# EAGLE board es (EAGLE 6.1)
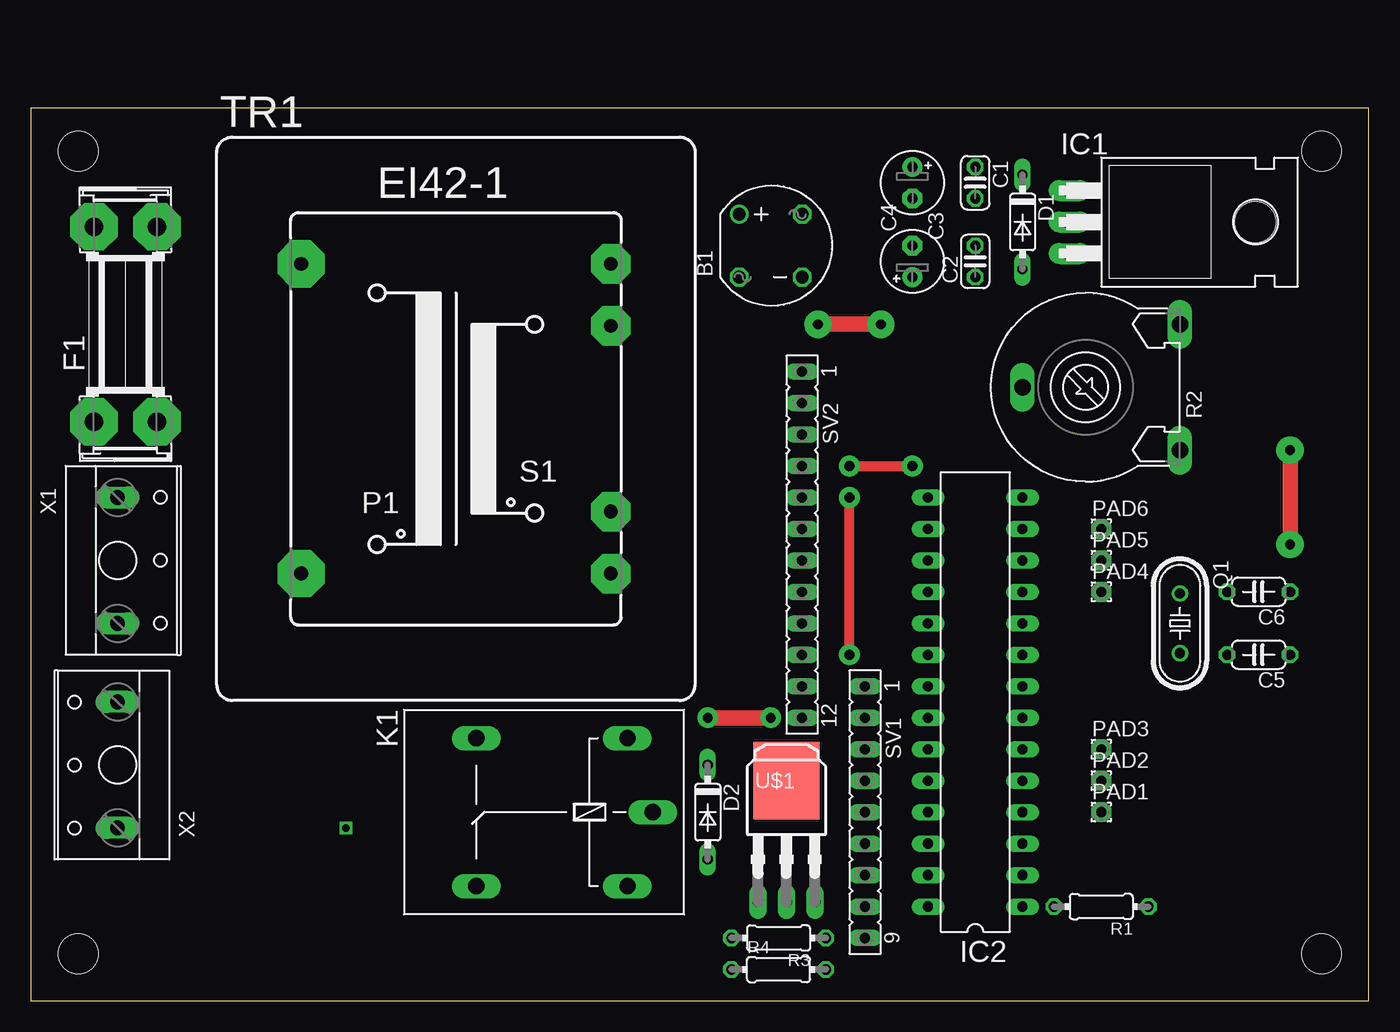
[diagram p0: board, top side]
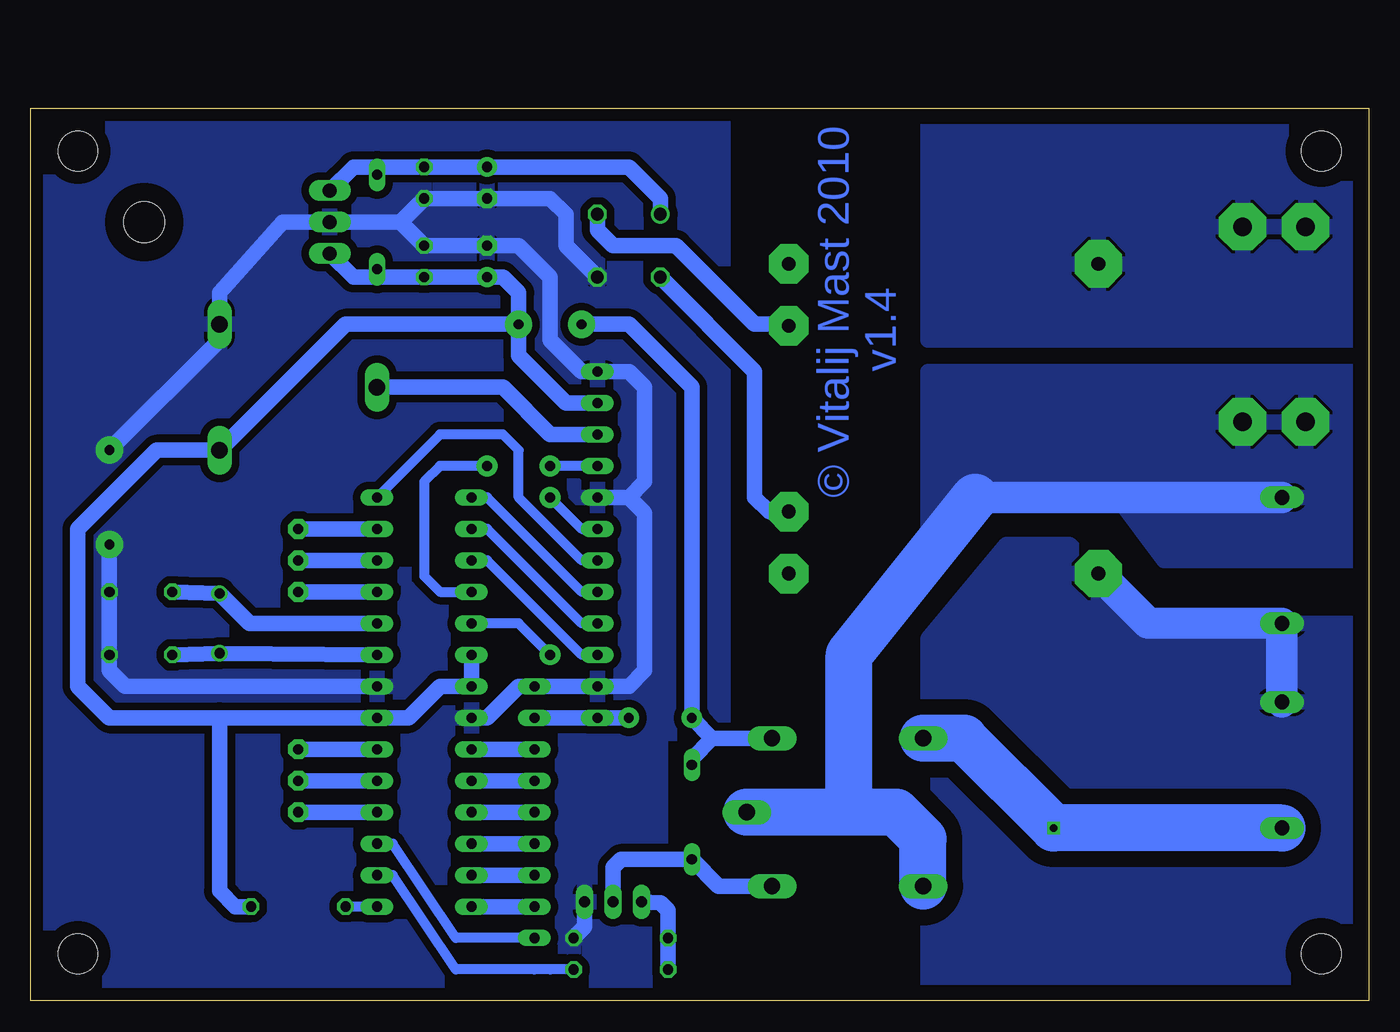
[diagram p1: board, bottom side, seen from below]

Size 107.93 x 72.06 mm. Coordinates in mm from the lower left corner, seen from the top.
Outline: 0,0 107.93,0 107.93,72.06 0,72.06 0,0
Copper layers (1*16): Top 0.035mm / dielectric 1.5mm / Bottom 0.035mm
Design rules: minimum track width 10mil, minimum drill 24mil, track to track 8mil, track to pad 8mil, pad to pad 8mil, via to via 8mil, smd to smd 8mil, copper to edge 40mil, drill to drill 8mil, minimum pad ring 10mil, minimum via ring 8mil, stop-mask expansion 4mil, vias tented up to drill 0mil, thermal gap 10mil
Holes 3.2 mm at 3.81,3.81 3.81,68.58 104.14,68.58 104.14,3.81

## Footprints (pad centres in the part's own frame; a part is rotated, then mirrored left to right if it is on the bottom)
RB1A = drill 1.016: + -2.54,2.54 | drill 1.016 octagon: - 2.54,-2.54; AC1 2.54,2.54; AC2 -2.54,-2.54
C025-024X044 = drill 0.813 octagon: 1 -1.27,0; 2 1.27,0
E2,5-5 = drill 0.813 pad 1.6: + -1.27,0 | drill 0.813 pad 1.6 octagon: - 1.27,0
C050-024X044 = drill 0.813 octagon: 1 -2.54,0; 2 2.54,0
DO35-7 = drill 0.813 long: A 3.81,0; C -3.81,0
SHK20Q = drill 1.5 pad 3.81 octagon: 1A -7.874,2.54; 1B -7.874,-2.54; 2A 7.874,2.54; 2B 7.874,-2.54
TO220H = drill 1.118 long: 1 -2.54,-10.16; 2 0,-10.16; 3 2.54,-10.16 | hole 3.302: 0,4.826
DIL28-3 = drill 0.813 long: 1 -16.51,-3.81; 2 -13.97,-3.81; 3 -11.43,-3.81; 4 -8.89,-3.81; 5 -6.35,-3.81; 6 -3.81,-3.81; 7 -1.27,-3.81; 8 1.27,-3.81; 9 3.81,-3.81; 10 6.35,-3.81; 11 8.89,-3.81; 12 11.43,-3.81; 13 13.97,-3.81; 14 16.51,-3.81; 15 16.51,3.81; 16 13.97,3.81; 17 11.43,3.81; 18 8.89,3.81; 19 6.35,3.81; 20 3.81,3.81; 21 1.27,3.81; 22 -1.27,3.81; 23 -3.81,3.81; 24 -6.35,3.81; 25 -8.89,3.81; 26 -11.43,3.81; 27 -13.97,3.81; 28 -16.51,3.81
G5LE = drill 1.321 long: 1 -7.493,-5.969; 2 -7.493,5.969; O 4.699,5.969; P -9.525,0; S 4.699,-5.969
1,6/0,8 = drill 0.813 pad 1.6 octagon: 1 0,0
HC49/S = drill 0.813: 1 -2.413,0; 2 2.413,0
0204/7 = drill 0.813 octagon: 1 -3.81,0; 2 3.81,0
LI15 = drill 1.321 long: A -5.08,-7.62; E 5.08,-7.62; S 0,5.08
FE09 = drill 0.813 long: 1 -10.16,0; 2 -7.62,0; 3 -5.08,0; 4 -2.54,0; 5 0,0; 6 2.54,0; 7 5.08,0; 8 7.62,0; 9 10.16,0
FE12 = drill 0.813 long: 1 -13.97,0; 2 -11.43,0; 3 -8.89,0; 4 -6.35,0; 5 -3.81,0; 6 -1.27,0; 7 1.27,0; 8 3.81,0; 9 6.35,0; 10 8.89,0; 11 11.43,0; 12 13.97,0
EI42-1 = drill 1.118 pad 3.81 octagon: 1 -12.497,12.497; 5 -12.497,-12.497 | drill 1.118 pad 3.175 octagon: 6 12.497,-12.497; 7 12.497,-7.493; 9 12.497,7.493; 10 12.497,12.497
I-PAK_TO251AA = drill 0.889 long: 1 -2.286,-5.334; 2 0,-5.334; 3 2.286,-5.334 | smd 5.334 x 6.223: 4 0,4.445
W237-2N = drill 1.194 long: 1 -5.08,-0.635; 2 5.08,-0.635

## Placement (x,y rotation side)
B1  B380  [RB1A]  59.69,60.96 0 top
C1  0.1µF  [C025-024X044]  76.2,66.04 270 top
C2  0.1µF  [C025-024X044]  76.2,59.69 90 top
C3  47µF  [E2,5-5]  71.12,66.04 270 top
C4  47µF  [E2,5-5]  71.12,59.69 90 top
C5  22pF  [C050-024X044]  99.06,27.94 180 top
C6  22pF  [C050-024X044]  99.06,33.02 180 top
D1  1N4148  [DO35-7]  80.01,62.87 270 top
D2  1N4148  [DO35-7]  54.61,15.24 270 top
F1  350mA  [SHK20Q]  7.62,54.61 90 top
IC1  7805T  [TO220H]  93.98,62.87 270 top
IC2  ATMEGA48/88/168-PU  [DIL28-3]  76.2,24.13 90 top
K1  FINDER 36.11.9  [G5LE]  40.64,15.24 180 top
PAD1  [1,6/0,8]  86.36,15.24 0 top
PAD2  [1,6/0,8]  86.36,17.78 0 top
PAD3  [1,6/0,8]  86.36,20.32 0 top
PAD4  [1,6/0,8]  86.36,33.02 0 top
PAD5  [1,6/0,8]  86.36,35.56 0 top
PAD6  [1,6/0,8]  86.36,38.1 0 top
Q1  20MHz  [HC49/S]  92.71,30.48 270 top
R1  10k  [0204/7]  86.36,7.62 180 top
R2  10k  [LI15]  85.09,49.53 90 top
R3  150k  [0204/7]  60.33,5.08 180 top
R4  180  [0204/7]  60.33,2.54 0 top
SV1  BUTTONS  [FE09]  67.31,15.24 270 top
SV2  LCD  [FE12]  62.23,36.83 270 top
TR1  9V Trafo  [EI42-1]  34.29,46.99 0 top
U$1  IRF1205  [I-PAK_TO251AA]  60.96,13.34 0 top
X1  ~230V  [W237-2N]  7.62,35.56 270 top
X2  ~230V-UV  [W237-2N]  6.35,19.05 90 top

## Library data of the parts
B1 = rectifier
C1-C6 R1 R3 R4 = rcl
D1 D2 = diode
F1 = fuse; OC_FARNELL: unknown; OC_NEWARK: unknown
IC1 = linear
IC2 = atmega8
K1 = relay
PAD1-PAD6 = wirepad
Q1 = crystal
R2 = pot
SV1 SV2 = con-lsta
TR1 = trafo
U$1 = transistor-power
X1 X2 = con-wago-508

## Nets
+5V: C2.1 C4.+ D1.A D2.C IC1.3 IC2.7 IC2.20 IC2.21 K1.1 R1.1 R2.A SV1.2 SV2.2 SV2.12
+9V: B1.+ C1.1 C3.+ D1.C IC1.1
B1: IC2.23 SV1.3
B2: IC2.24 SV1.4
B3: IC2.25 SV1.5
B4: IC2.26 SV1.6
B5: IC2.27 SV1.7
B6: IC2.28 SV1.8
C0: R2.S SV2.3
D4: IC2.14 SV2.7
D5: IC2.15 SV2.8
D6: IC2.16 SV2.9
D7: IC2.17 SV2.10
E: IC2.19 SV2.6
GND: B1.- C1.2 C2.2 C3.- C4.- C5.1 C6.1 IC1.2 IC2.8 IC2.22 R2.E R3.1 SV1.1 SV2.1 SV2.5 SV2.11 U$1.3
N$1: D2.A K1.2 U$1.2
N$2: IC2.4 PAD1.1
N$3: C5.2 IC2.9 Q1.2
N$4: B1.AC1 TR1.9
N$5: F1.2A F1.2B TR1.1
N$6: K1.S X2.1
N$7: B1.AC2 TR1.7
N$8: IC2.5 PAD2.1
N$9: IC2.1 R1.2
N$10: C6.2 IC2.10 Q1.1
N$11: IC2.6 PAD3.1
N$12: IC2.11 PAD4.1
N$13: IC2.12 PAD5.1
N$14: IC2.13 PAD6.1
N$15: R3.2 R4.1 U$1.1
RS: IC2.18 SV2.4
SLED: IC2.3 SV1.9
UVS: IC2.2 R4.2
V+: F1.1A F1.1B K1.O K1.P X1.1
V-: TR1.5 X1.2 X2.2

## Tracks (layer width: path | path; a pad name or v marks a point on that pad's centre or on a via)
+5V  (via drill 0.8 pad 1.68, 0.8 pad 2.18)
  Top 1.27: v54.61,22.86 v59.69,22.86 | v63.5,54.61 v68.58,54.61
  Bottom 1.27: 80.01,58.42 C2.1 C4.+ 69.85,58.42 68.58,57.15 v68.58,54.61 | 80.01,58.42 81.92,58.42 IC1.3 | v68.58,54.61 68.58,52.07 64.77,48.26 SV2.2 | SV1.2 SV2.12 v59.69,22.86 | IC2.20 IC2.21 74.93,25.4 77.47,22.86 IC2.7 92.71,22.86 | R1.1 91.44,7.62 92.71,8.89 92.71,22.86 | 92.71,22.86 101.6,22.86 104.14,25.4 104.14,38.1 97.79,44.45 R2.A 82.55,54.61 v68.58,54.61 | v63.5,54.61 59.69,54.61 54.61,49.53 v54.61,22.86 52.96,21.21 | 80.01,58.42 D1.A | K1.1 52.96,21.21 | D2.C 54.61,19.56 52.96,21.21
+9V
  Bottom 1.27: IC1.1 81.92,67.31 80.01,67.31 | 80.01,67.31 D1.C | 80.01,67.31 C1.1 C3.+ 59.69,67.31 57.15,64.77 B1.+
B1
  Bottom 1.27: SV1.3 IC2.23
B2
  Bottom 1.27: SV1.4 IC2.24
B3
  Bottom 1.27: SV1.5 IC2.25
B4
  Bottom 1.27: SV1.6 IC2.26
B5
  Bottom 1.27: SV1.7 IC2.27
B6
  Bottom 1.27: SV1.8 IC2.28
C0
  Bottom 1.27: SV2.3 66.04,45.72 69.85,49.53 R2.S
D4
  Bottom 0.813: SV2.7 63.5,35.56 68.58,40.64 68.58,44.45 69.85,45.72 74.93,45.72 IC2.14
D5
  Bottom 0.813: IC2.15 71.12,40.64 63.5,33.02 SV2.8
D6
  Bottom 0.813: IC2.16 71.12,38.1 63.5,30.48 SV2.9
D7
  Bottom 0.813: IC2.17 71.12,35.56 63.5,27.94 SV2.10
E  (via drill 0.8 pad 1.68)
  Top 0.813: v66.04,27.94 v66.04,40.64
  Bottom 0.813: v66.04,27.94 68.58,30.48 IC2.19 | SV2.6 63.5,38.1 v66.04,40.64
GND  (via drill 0.8 pad 2.18)
  Top 1.27: v101.6,44.45 v101.6,36.83
  Bottom 1.27: B1.- 64.77,60.96 64.77,63.5 66.04,64.77 C3.- C1.2 78.11,62.87 | 78.11,62.87 IC1.2 87.63,62.87 92.71,57.15 R2.E 92.71,53.34 v101.6,44.45 | 78.11,62.87 C2.2 C4.- 68.58,60.96 66.04,58.42 66.04,53.34 63.5,50.8 SV2.1 59.69,50.8 58.42,49.53 58.42,41.91 59.69,40.64 | IC2.8 100.33,25.4 101.6,26.67 C5.1 C6.1 v101.6,36.83 | IC2.22 71.12,22.86 68.58,25.4 SV1.1 SV2.11 59.69,25.4 58.42,26.67 58.42,39.37 59.69,40.64 | 59.69,40.64 SV2.5 | R3.1 63.25,5.97 U$1.3
  pour Bottom (isolate 0.61): 107.95,72.39 52.07,72.39 52.07,21.59 57.15,21.59 57.15,0 66.04,0 66.04,22.86 62.23,22.86 62.23,27.94 72.39,27.94 72.39,0 107.95,0
N$1
  Bottom 1.27: K1.2 52.45,9.27 D2.A 60.33,11.43 60.96,10.79 U$1.2
N$2
  Bottom 1.27: IC2.4 PAD1.1
N$3
  Bottom 1.27: C5.2 Q1.2 IC2.9
N$4
  Bottom 1.27: TR1.9 46.91,54.61 49.53,54.61 55.88,60.96 60.96,60.96 62.23,62.23 B1.AC1
N$5
  pour Bottom (isolate 1.27): 0,72.39 0,53.34 35.56,53.34 35.56,72.39
N$6  (via drill 0.6)
  Bottom 3.81: K1.S 32.64,21.21 v25.4,13.97 X2.1
N$7
  Bottom 1.27: TR1.7 48.39,39.5 49.53,40.64 49.53,50.8 B1.AC2
N$8
  Bottom 1.27: IC2.5 PAD2.1
N$9
  Bottom 0.813: IC2.1 R1.2
N$10
  Bottom 1.27: C6.2 Q1.1 90.3,30.48 IC2.10
N$11
  Bottom 1.27: IC2.6 PAD3.1
N$12
  Bottom 1.27: IC2.11 PAD4.1
N$13
  Bottom 1.27: IC2.12 PAD5.1
N$14
  Bottom 1.27: IC2.13 PAD6.1
N$15
  Bottom 1.27: R4.1 R3.2 56.52,7.3 57.15,7.94 U$1.1
RS  (via drill 0.8 pad 1.68)
  Top 0.813: v66.04,43.18 v71.12,43.18
  Bottom 0.813: IC2.18 74.93,33.02 76.2,34.29 76.2,41.91 74.93,43.18 v71.12,43.18 | SV2.4 v66.04,43.18
SLED
  Bottom 0.813: SV1.9 73.66,5.08 78.74,12.7 IC2.3
UVS
  Bottom 0.813: IC2.2 78.74,10.16 73.66,2.54 67.31,2.54 66.04,2.54 R4.2
V+
  Bottom 2.54: 31.75,40.64 X1.1
  Bottom 3.81: 31.75,40.64 41.91,27.94 41.91,15.24 | 41.91,15.24 K1.P | 41.91,15.24 38.1,15.24 35.94,13.08 K1.O
  pour Bottom (isolate 1.27): 0,35.56 16.51,35.56 20.32,40.64 33.02,40.64 35.56,38.1 35.56,50.8 0,50.8
V-
  Bottom 2.54: TR1.5 17.8,30.5 X1.2 X2.2
  pour Bottom (isolate 1.27): 0,30.48 17.78,30.48 24.13,36.83 29.21,36.83 35.56,29.21 35.56,0 0,0

## Text on the board
Bottom: v1.4 | © Vitalij Mast 2010